# EAGLE board Stoplight Feather PCB v14 (EAGLE 9.7.0)
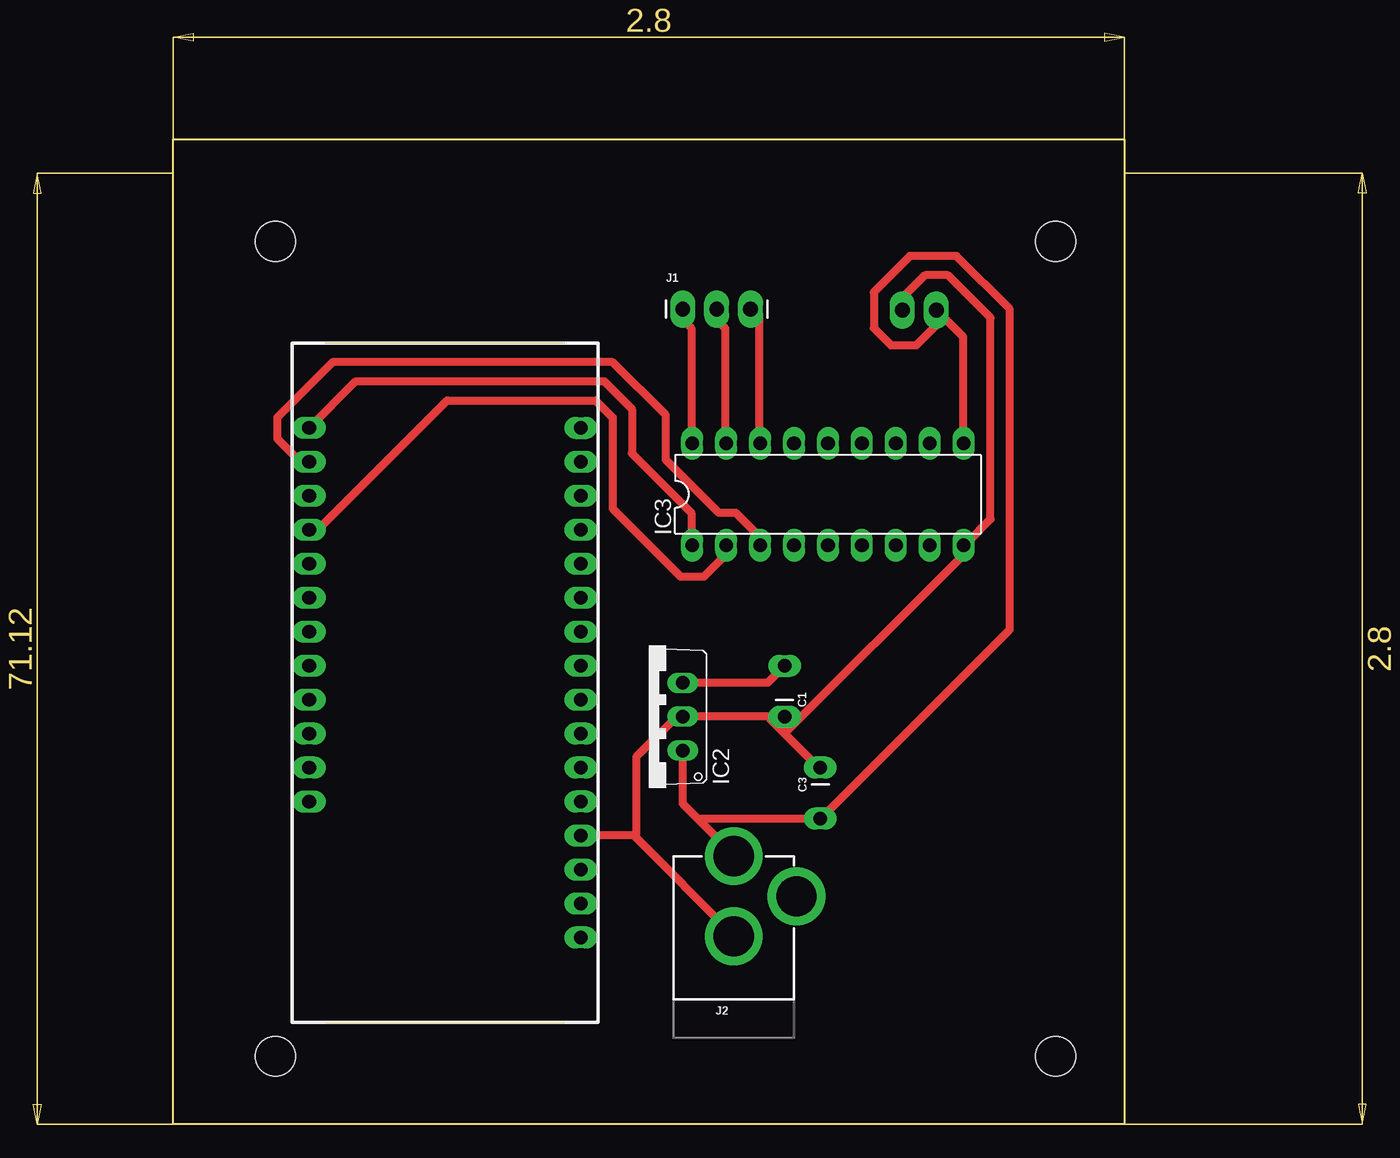
[diagram p0: board, top side]

Size 71.12 x 73.66 mm. Coordinates in mm from the lower left corner, seen from the top.
Outline: 0,73.66 71.12,73.66 71.12,0 0,0 0,73.66
Copper layers (1*16): Top / Bottom
Stack-up Default Layer Stack: Top User Defined 0.035mm / Dielectric-1 User Defined 1.5mm / Bottom User Defined 0.035mm
Design rules "OthermillDRC_1_32_v2": minimum track width 8mil, minimum drill 0.8mm, track to track 0.794003125mm, track to pad 0.794003125mm, pad to pad 0.794003125mm, via to via 0.794003125mm, smd to smd 0mil, copper to edge 0mil, drill to drill 1mil, minimum pad ring 10mil, minimum via ring 10mil, stop-mask expansion 1mil, vias tented up to drill 30mil, thermal gap 10mil
Net classes: 0 default: width 0.61 mm, drill 0.61 mm, clearance 0.61 mm
Holes 3 mm at 7.62,66.04 7.62,5.08 65.99,5.08 65.99,66.04

## Footprints (pad centres in the part's own frame; a part is rotated, then mirrored left to right if it is on the bottom)
CAP-PTH-2.54 = drill 1.016 pad 1.651 long: 1 -2.54,0; 2 1.27,0
TO220V = drill 1.016 long: 1 -2.54,-2.54; 2 0,-2.54; 3 2.54,-2.54
DIL18 = drill 1.016 pad 1.651 long: 1 -10.16,-3.81; 2 -7.62,-3.81; 3 -5.08,-3.81; 4 -2.54,-3.81; 5 0,-3.81; 6 2.54,-3.81; 7 5.08,-3.81; 8 7.62,-3.81; 9 10.16,-3.81; 10 10.16,3.81; 11 7.62,3.81; 12 5.08,3.81; 13 2.54,3.81; 14 0,3.81; 15 -2.54,3.81; 16 -5.08,3.81; 17 -7.62,3.81; 18 -10.16,3.81
1X03_LONGPADS = drill 1.118 pad 1.88 long: 1 0,0; 2 2.54,0; 3 5.08,0
POWER_JACK_PTH = drill 2.997 pad 4.318: GND 0,7.7; GNDBREAK 4.7,10.7; PWR 0,13.7
1X02_LONGPADS = drill 1.118 pad 1.88 long: 1 0,0; 2 2.54,0
FEATHERWING = drill 1.016 pad 1.651 long: 1 6.35,1.27; 2 8.89,1.27; 3 11.43,1.27; 4 13.97,1.27; 5 16.51,1.27; 6 19.05,1.27; 7 21.59,1.27; 8 24.13,1.27; 9 26.67,1.27; 10 29.21,1.27; 11 31.75,1.27; 12 34.29,1.27; 13 36.83,1.27; 14 39.37,1.27; 15 41.91,1.27; 16 44.45,1.27; 17 44.45,21.59; 18 41.91,21.59; 19 39.37,21.59; 20 36.83,21.59; 21 34.29,21.59; 22 31.75,21.59; 23 29.21,21.59; 24 26.67,21.59; 25 24.13,21.59; 26 21.59,21.59; 27 19.05,21.59; 28 16.51,21.59

## Placement (x,y rotation side)
C1  22pF  [CAP-PTH-2.54]  45.72,31.75 270 top
C3  22pF  [CAP-PTH-2.54]  48.39,25.4 90 top
IC2  7805TV  [TO220V]  35.56,30.48 90 top
IC3  [DIL18]  48.96,47.12 0 top
J1  [1X03_LONGPADS]  38.1,60.96 0 top
J2  POWER_JACK  [POWER_JACK_PTH]  41.91,6.35 0 top
J3  [1X02_LONGPADS]  57.06,60.87 0 bottom
MS1  FEATHERWING  [FEATHERWING]  31.75,7.62 90 top

## Library data of the parts
C1 C3 = Capacitor Long Pads; PROD_ID: CAP-09128
IC2 = linear
IC3 = ULN2803 Long Pads
J1 = 3 pin header Long pad
J2 = SparkFun-Connectors; PROD_ID: CONN-08197
J3 = SparkFun-Connectors
MS1 = Feather Huzzah Long Pads

## Nets
3.3V: C1.1 IC2.3
5V: C3.1 IC2.1 IC3.10 J2.PWR J3.1
GND: C1.2 C3.2 IC2.2 IC3.9 J2.GND J3.2 MS1.4
GREEN: IC3.1 MS1.17
N$1: J2.GNDBREAK
N$2: IC3.18 J1.1
N$3: IC3.17 J1.2
N$4: IC3.16 J1.3
RED: IC3.3 MS1.18
YELLOW: IC3.2 MS1.20

## Tracks (layer width: path | path; a pad name or v marks a point on that pad's centre or on a via)
3.3V
  Top 0.61: IC2.3 44.45,33.02 C1.1
5V
  Top 0.61: IC3.10 59.06,50.96 59.06,58.9 57.15,60.8 J3.1 57.47,60.17 55.56,58.26 53.66,58.26 52.39,59.53 52.39,62.23 55.09,64.93 58.58,64.93 62.55,60.96 62.55,36.99 48.58,23.02 C3.1 39.53,22.86 39.37,22.7 | IC2.1 38.1,23.97 39.37,22.7 | 39.37,22.7 41.91,20.16 J2.PWR
GND
  Top 0.61: 34.45,21.59 MS1.4 | 34.45,21.59 41.91,14.13 J2.GND | 45.72,29.21 44.61,30.32 C1.2 IC2.2 37.94,30.32 37.47,30.32 34.61,27.46 34.61,21.75 34.45,21.59 | 45.72,29.21 48.26,26.67 C3.2 | 45.72,29.21 59.06,42.55 59.06,43.18 IC3.9 59.37,43.5 61.12,45.24 61.12,60.33 57.94,63.5 56.2,63.5 54.61,61.91 54.61,60.96 J3.2
GREEN
  Top 0.61: MS1.17 13.65,55.56 32.23,55.56 34.29,53.5 34.29,50.16 38.73,45.72 38.73,43.34 IC3.1
N$2
  Top 0.61: J1.1 38.1,60.17 38.73,59.53 38.73,50.96 IC3.18
N$3
  Top 0.61: J1.2 40.64,60.17 41.28,59.53 41.28,50.96 IC3.17
N$4
  Top 0.61: J1.3 43.81,60.33 43.81,50.96 IC3.16
RED
  Top 0.61: MS1.18 9.53,49.53 7.78,51.28 7.78,52.86 11.91,56.99 32.86,56.99 36.83,53.02 36.83,49.69 40.8,45.72 42.07,45.72 43.81,43.97 43.81,43.34 IC3.3
YELLOW
  Top 0.61: MS1.20 10.79,44.45 20.48,54.13 31.59,54.13 32.86,52.86 32.86,46.04 37.94,40.96 39.69,40.96 41.28,42.55 41.28,43.18 IC3.2